# Altium PCB mach nguon pcb.PcbDoc
Units mil, origin at the board's own origin, x right, y up, seen from the top; angles counter-clockwise.
Board outline 6000 x 4000 mil, 2 copper layers (Top Layer, Bottom Layer); 9 components, 4 nets, 21 pads, 0 vias.
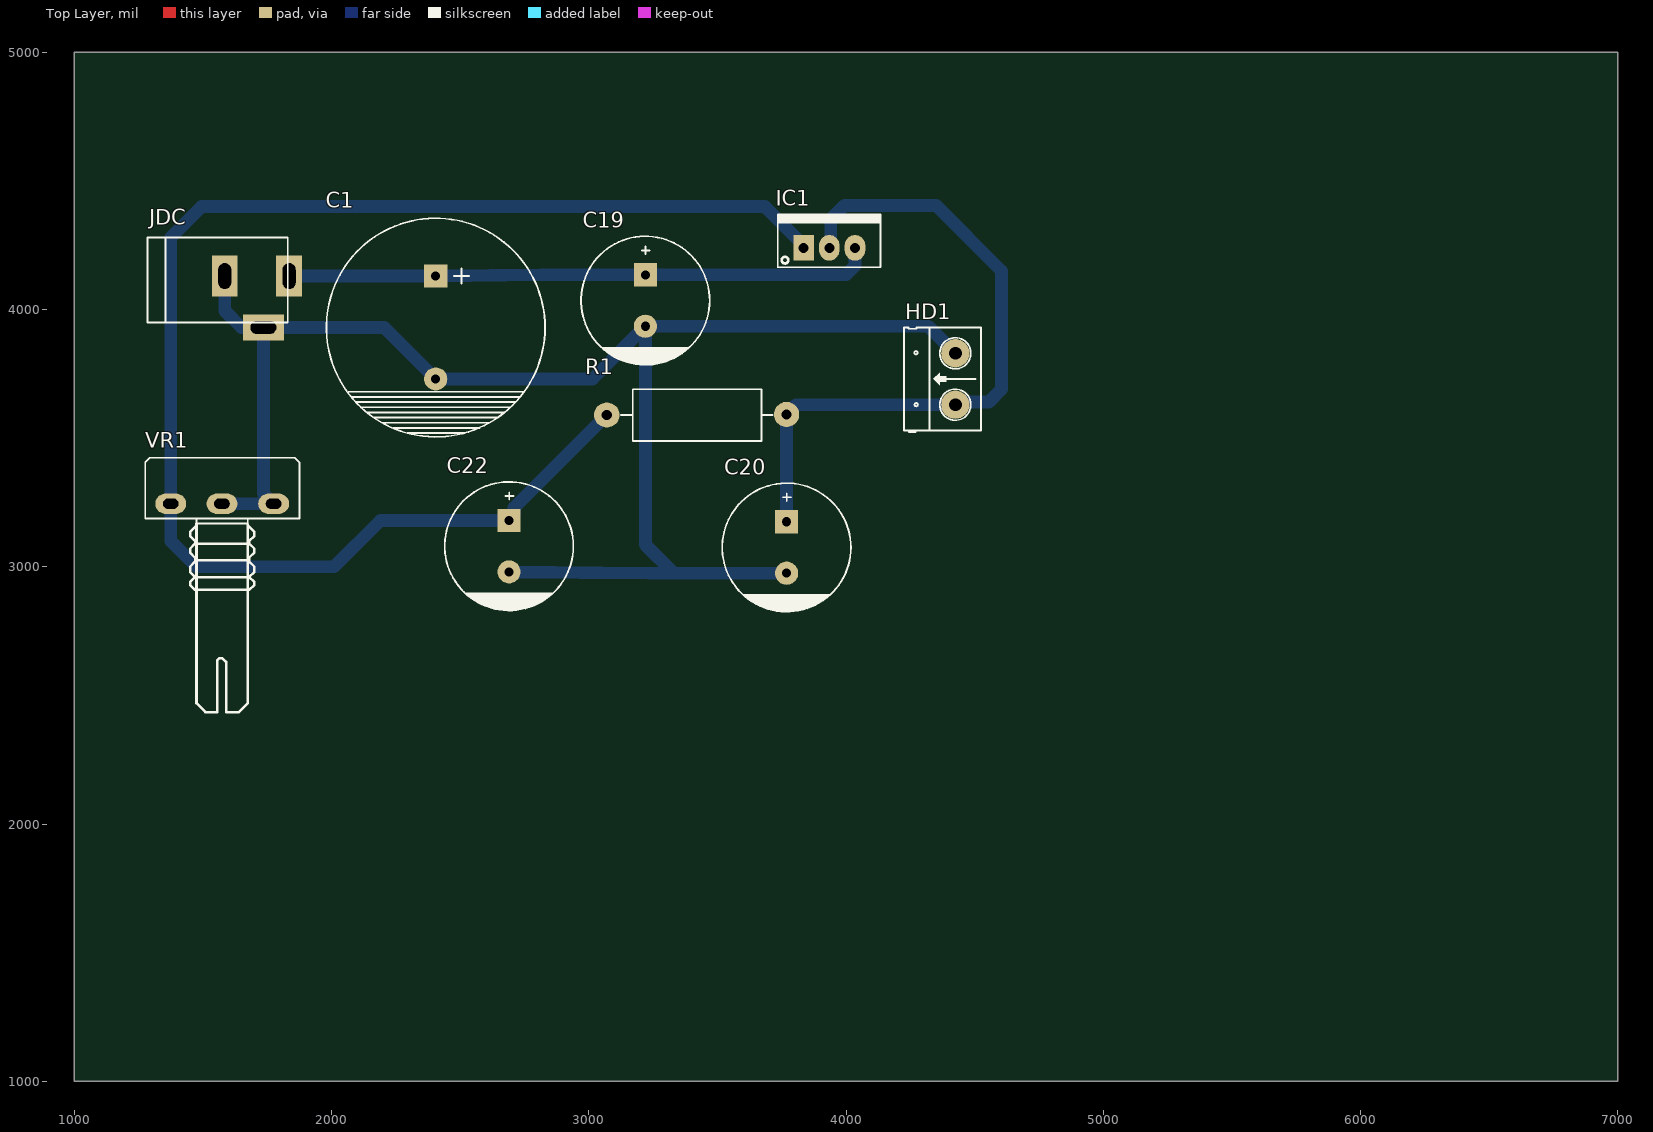
[diagram p0: Top Layer view]
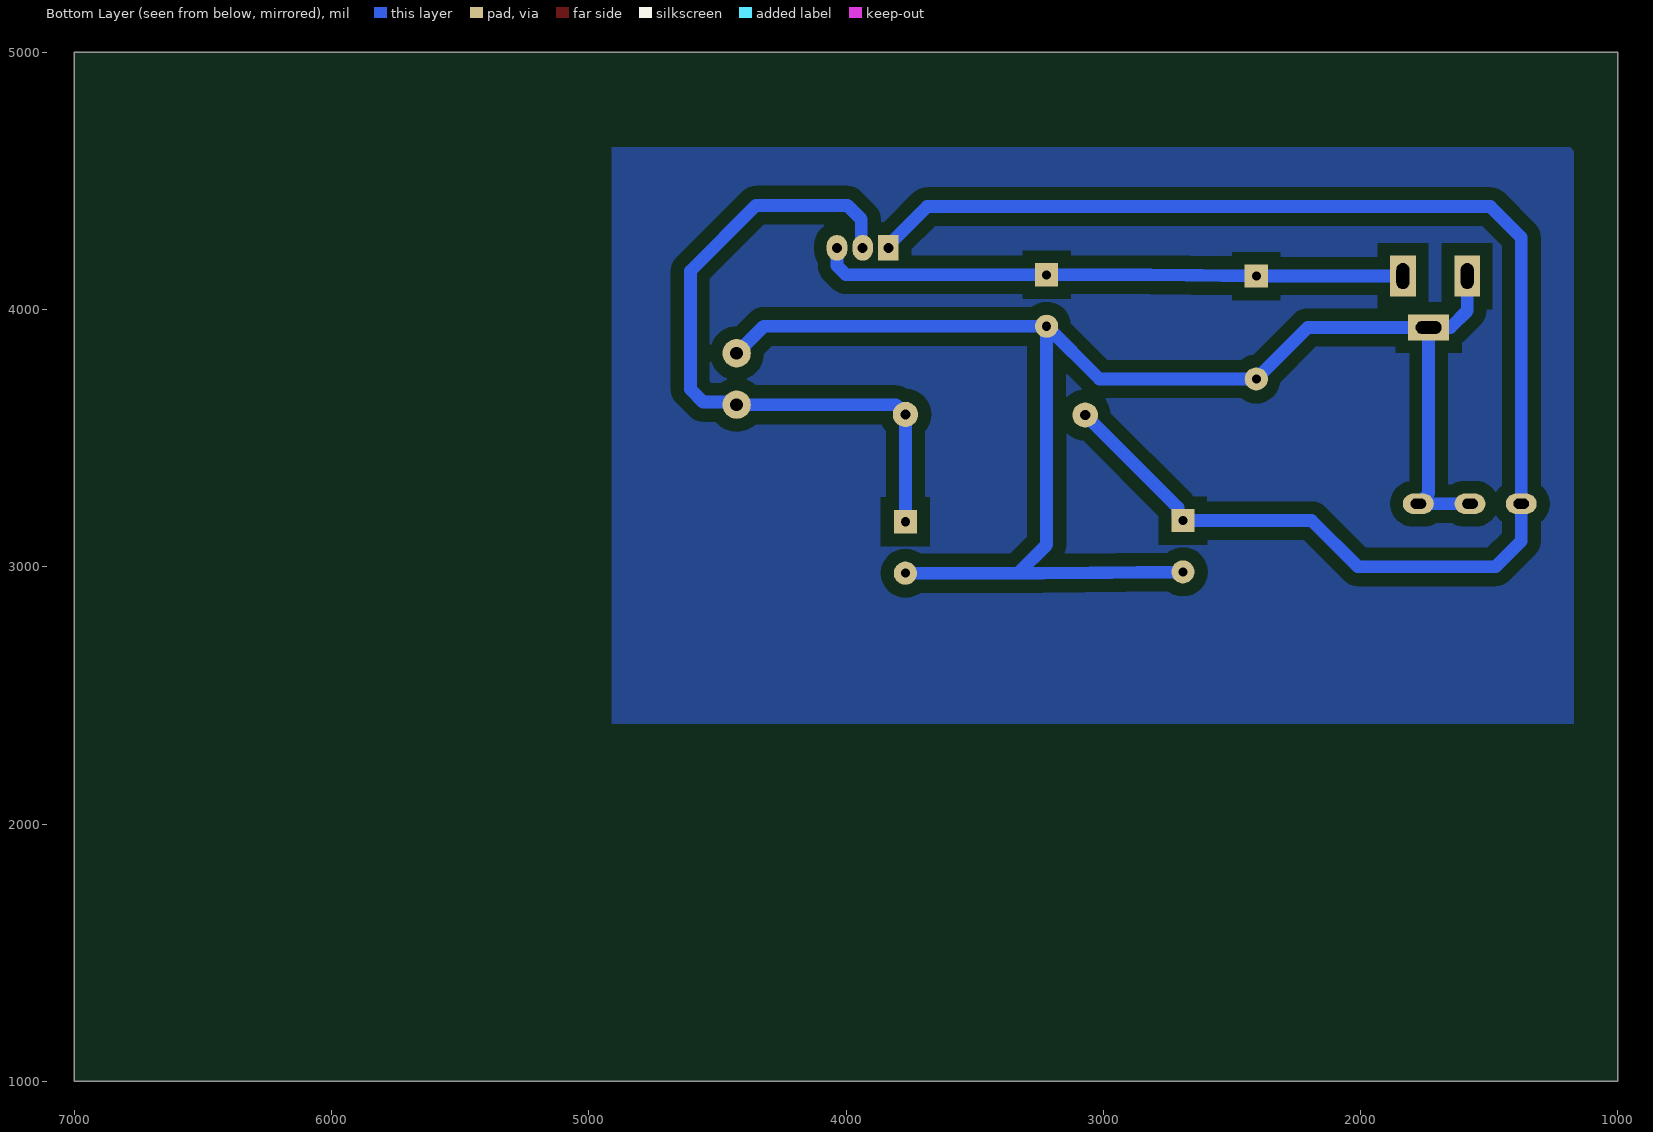
[diagram p1: Bottom Layer view, seen from below]
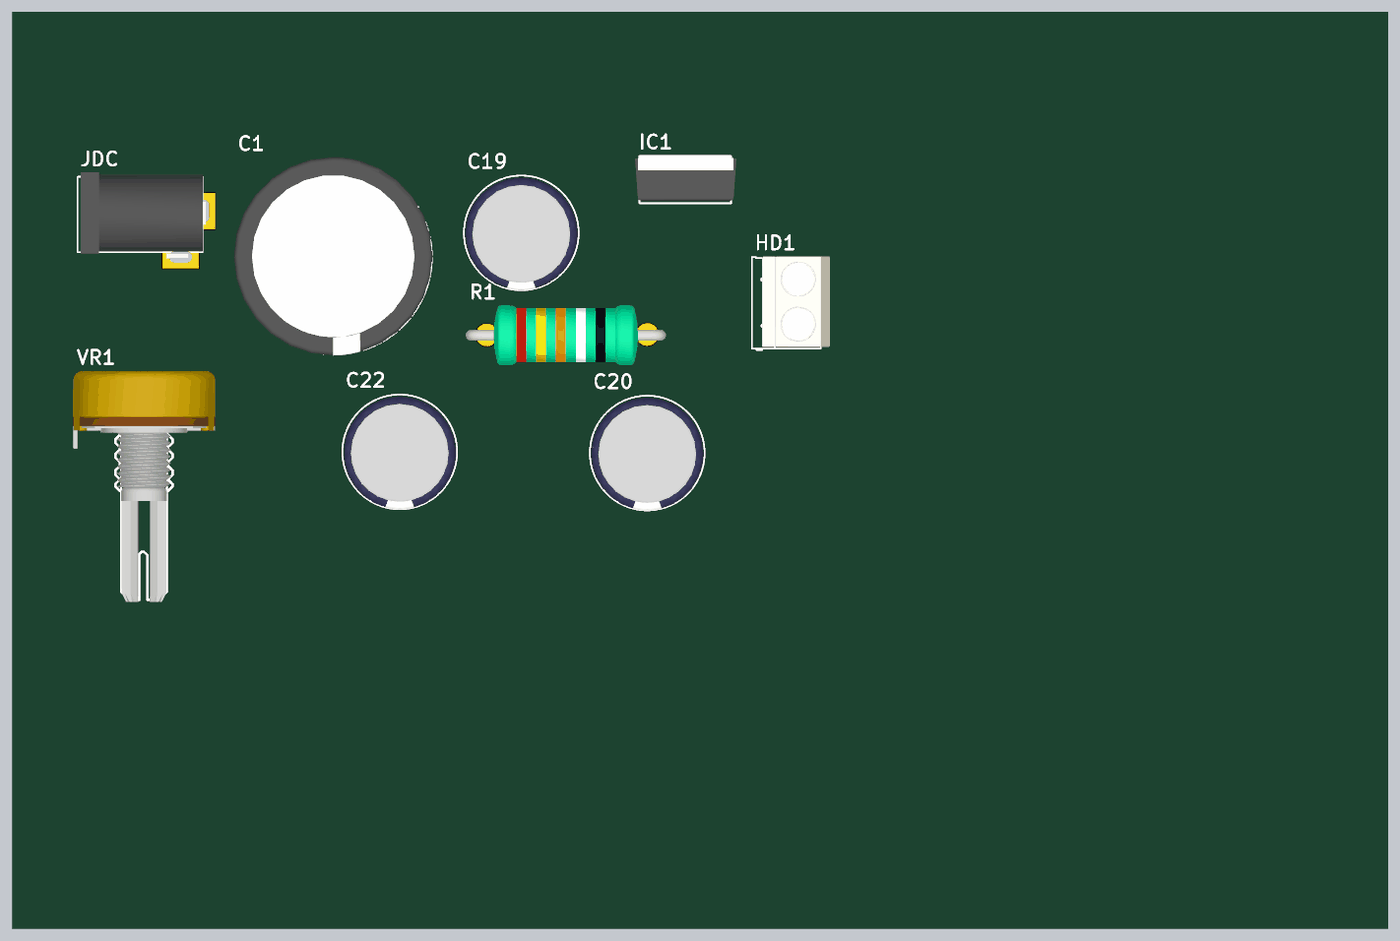
[diagram p2: 3D render of the assembled board from above, using the file's embedded part models]

## Layer stack, top to bottom
Top Solder: solder mask 0.4, Solder Resist, Dk 3.5
Top Layer: signal copper 1.4
Dielectric 1: dielectric 12.6, FR-4, Dk 4.8
Bottom Layer: signal copper 1.4
Bottom Solder: solder mask 0.4, Solder Resist, Dk 3.5

## Board outline
1000,1000 7000,1000 7000,5000 1000,5000

## Design rules (kind name [scope] priority, off if disabled: settings)
Clearance [All] p1: gap=50 ignorepadtopadclearanceinfootprint=FALSE
PolygonConnect [All] p1: connectstyle=Relief reliefconductorwidth=10 reliefentries=4 polygonreliefangle="90 Angle" airgapwidth=10
RoutingLayers [All] p1: top layer_v5=FALSE bottom layer_v5=TRUE
RoutingVias [All] p1: holewidth=28 width=50 viastyle="Through Hole" minholewidth=28 minwidth=50 maxholewidth=28 maxwidth=50
SolderMaskExpansion [All] p1: expansion=4
Width [All] p1: maxlimit=50 minlimit=50 preferedwidth=50
29 further rules are at their usual default settings.

## Components (designator, comment, footprint, x,y, rotation, side; value= is the part's Value field where it differs from the comment)
C1 "4700uF/50V" CP4/8.5 2405,4130 r270 top
C19 "Cap Pol3" CP2/5 3220,4135 r270 top value=1000pF/35V
C20 "Cap Pol3" CP2/5 3769,3175 r270 top value=1000pF/35V
C22 "Cap Pol3" CP2/5 2690,3180 r270 top value=1000pF/35V
HD1 "Header 2" HED2 4425,3630 r90 top
IC1 "LM317" QTO-220 3835,4240 r0 top
JDC "Jac DC" DC-IN 1710,4030 r0 top
R1 "47/2W" R2W 3070,3590 r0 top value="R2W - 47"
VR1 "50K" VR-S1 1575,3245 r0 top value="Volume 50k"

## Footprints (in the part's own frame and the unit in brackets; to place one, negate y for a bottom-side part, rotate by r counter-clockwise, add the part's x,y. Pads: shape width x height; smd on the part's side, far side on the other; paste and mask are expansions set on the pad)
CP2/5 [mil] "Tu hoa 1000uF/25V,50V"
  rect 90x90 hole 35: 1(0,0)
  round 90 hole 35: 2(200,0)
  silkscreen extent -150,-250 350,250, body extent -142,-246 350,246, height 984
CP4/8.5 [mil] "Tu hoa 4700uF/50V"
  rect 90x90 hole 35: 1(0,0)
  round 90 hole 35: 2(400,0)
  silkscreen extent -225,-425 625,425, body extent -236,-438 630,428, height 984
DC-IN [mil] "Jac DC input"
  rect 100x160 hole 50 slot 100 at 90 deg: 1(125,100) 2(-125,100)
  rect 160x100 hole 50 slot 100 at 0 deg: 3(25,-100)
  silkscreen extent -425,-80 120,250, body extent -410,-105 134,269, height 434
HED2 [mil] "Header 2, 2 pin, hight 300mil, Pin to Pin 200, Colour Green"
  round 110 hole 50: 1(0,0) 2(200,0)
  silkscreen extent -106,-100 300,200, body extent -92,-140 302,155, height 394
QTO-220 [mil] "TO-220 - 1-2-3"
  rect 80x100 hole 39: 1(0,0)
  oval 80x100 hole 39: 2(100,0) 3(200,0)
  silkscreen extent -100,-76 300,130, body extent -119,-64 322,121, height 755
R2W [mm] "R2W, 2 pin, 700mil"
  round 2.5 hole 1: 1(0,0) 2(17.755,0.051)
  silkscreen extent 1.37,-2.57 16.38,2.54, body extent -2.36,-3.33 19.84,3.27, height 8.3
VR-S1 [mil]
  oval 120x78.74 hole 40 slot 60 at 0 deg: 1(-200,0) 2(-1,0) 3(200,0)
  silkscreen extent -299,-810 300,179, body extent -310,-818 310,188, height 839

## Part data
C1: library part CP7, "Cap 4700uF/50V"
C19: library part "Cap Pol3_1", "Polarized Capacitor (Surface Mount)", LatestRevisionDate=17-Jul-2002, LatestRevisionNote="Re-released for DXP Platform.", PackageReference=C0805, Publisher="Altium Limited"
C20: library part "Cap Pol3_2", "Polarized Capacitor (Surface Mount)", LatestRevisionDate=17-Jul-2002, LatestRevisionNote="Re-released for DXP Platform.", PackageReference=C0805, Publisher="Altium Limited"
C22: library part "Cap Pol3_3", "Polarized Capacitor (Surface Mount)", LatestRevisionDate=17-Jul-2002, LatestRevisionNote="Re-released for DXP Platform.", PackageReference=C0805, Publisher="Altium Limited"
HD1: library part Hed2, "Header 2 (Green)"
IC1: "Adj Voltage +1.2 -> +37V"
JDC: library part DCIN, "Jac DC input"
R1: library part R2W, "Resistor 2W"
VR1: library part VR-S, "Var Resistor"

## Nets (pads, with @x,y where several pads share a name; then routed paths per layer and width w, separated by ;. In a path a pad name is that pad's centre, name@x,y a point inside that pad or via, vN(x,y) a via of type N, cw(c..) or ccw(c..) an arc to the next point about the centre after c; other vN are vias at no path point)
GND: C1.2 C19.2 C20.2 C22.2 HD1.2 JDC.2 JDC.3 VR1.2 VR1.3 | length 6200.8
  Bottom Layer w50: VR1.2 VR1.3 1735,3285 JDC.3 ; JDC.2 1585,3995 1650,3930 JDC.3 ; C22.2 3235,2975 3331.03,2975 ; C20.2 3331.03,2975 ; HD1.2 4320,3935 C19.2 ; JDC.3 2205,3930 C1.2 3015,3730 C19.2 ; C19.2 3220,3086.03 3331.03,2975
NetC20_1: C20.1 HD1.1 IC1.2 R1.2 | length 2659.1
  Bottom Layer w50: C20.1 R1.2 3807,3630 HD1.1 4435,3640 4555,3640 4605,3690 4605,4150 4350,4405 3995,4405 3940.74,4350.74 3940.74,4245.74 IC1.2
NetC22_1: C22.1 IC1.1 R1.1 VR1.1 | length 5760.2
  Bottom Layer w50: R1.1 2710,3230 2710,3200 C22.1 2190,3180 2010,3000 1475,3000 1375,3100 VR1.1 1375,4280 1495,4400 3685,4400 3835,4250 IC1.1
VCC: C1.1 C19.1 IC1.3 JDC.1 | length 2284.5
  Bottom Layer w50: JDC.1 C1.1 2818,4135 C19.1 4000,4135 4035,4170 IC1.3

## Polygon pours and split planes (outlines as drawn)
no net on Bottom Layer (solid, pour order 6): 1170,4630
no net on Bottom Layer (solid, pour order 4): 1170,2390 4910,2390 4910,4630 1185,4630 1170,4615